# Altium PCB PCB1.PcbDoc
Units mil, origin at the board's own origin, x right, y up, seen from the top; angles counter-clockwise.
Board outline 1875 x 1255 mil, 2 copper layers (Top Layer, Bottom Layer); 10 components, 6 nets, 21 pads, 0 vias.
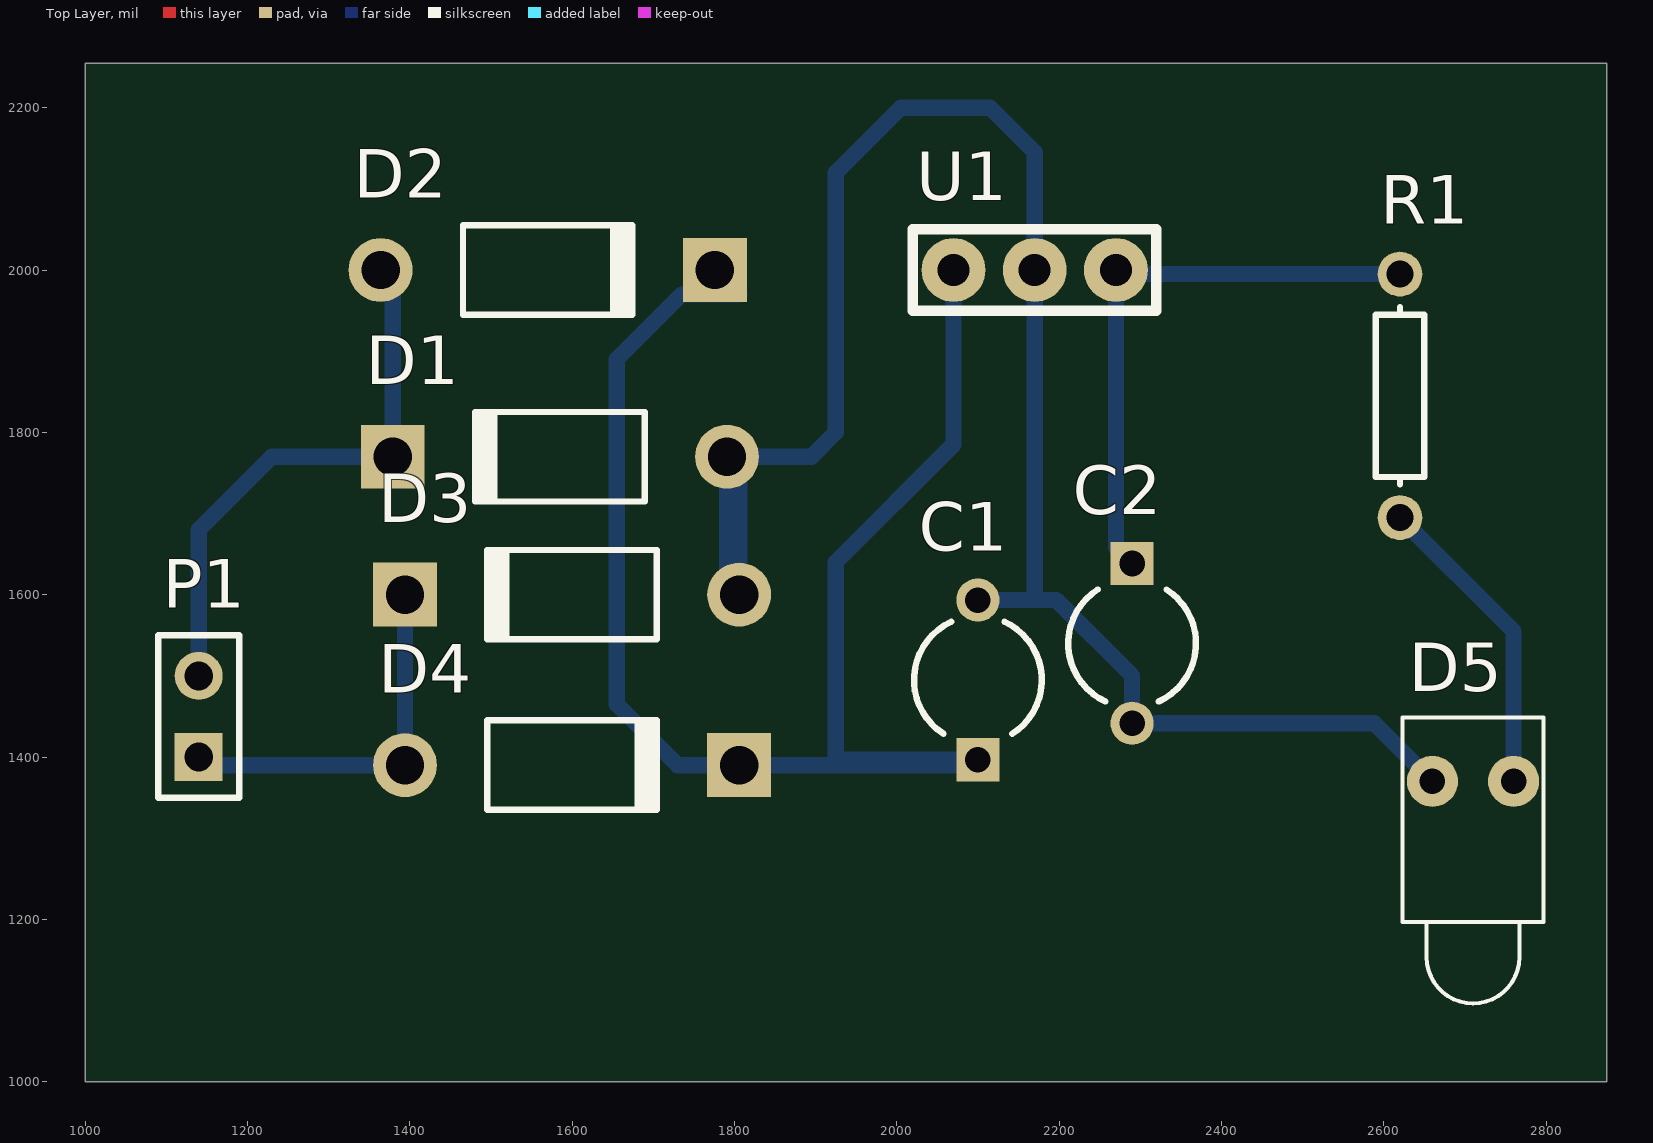
[diagram p0: Top Layer view]
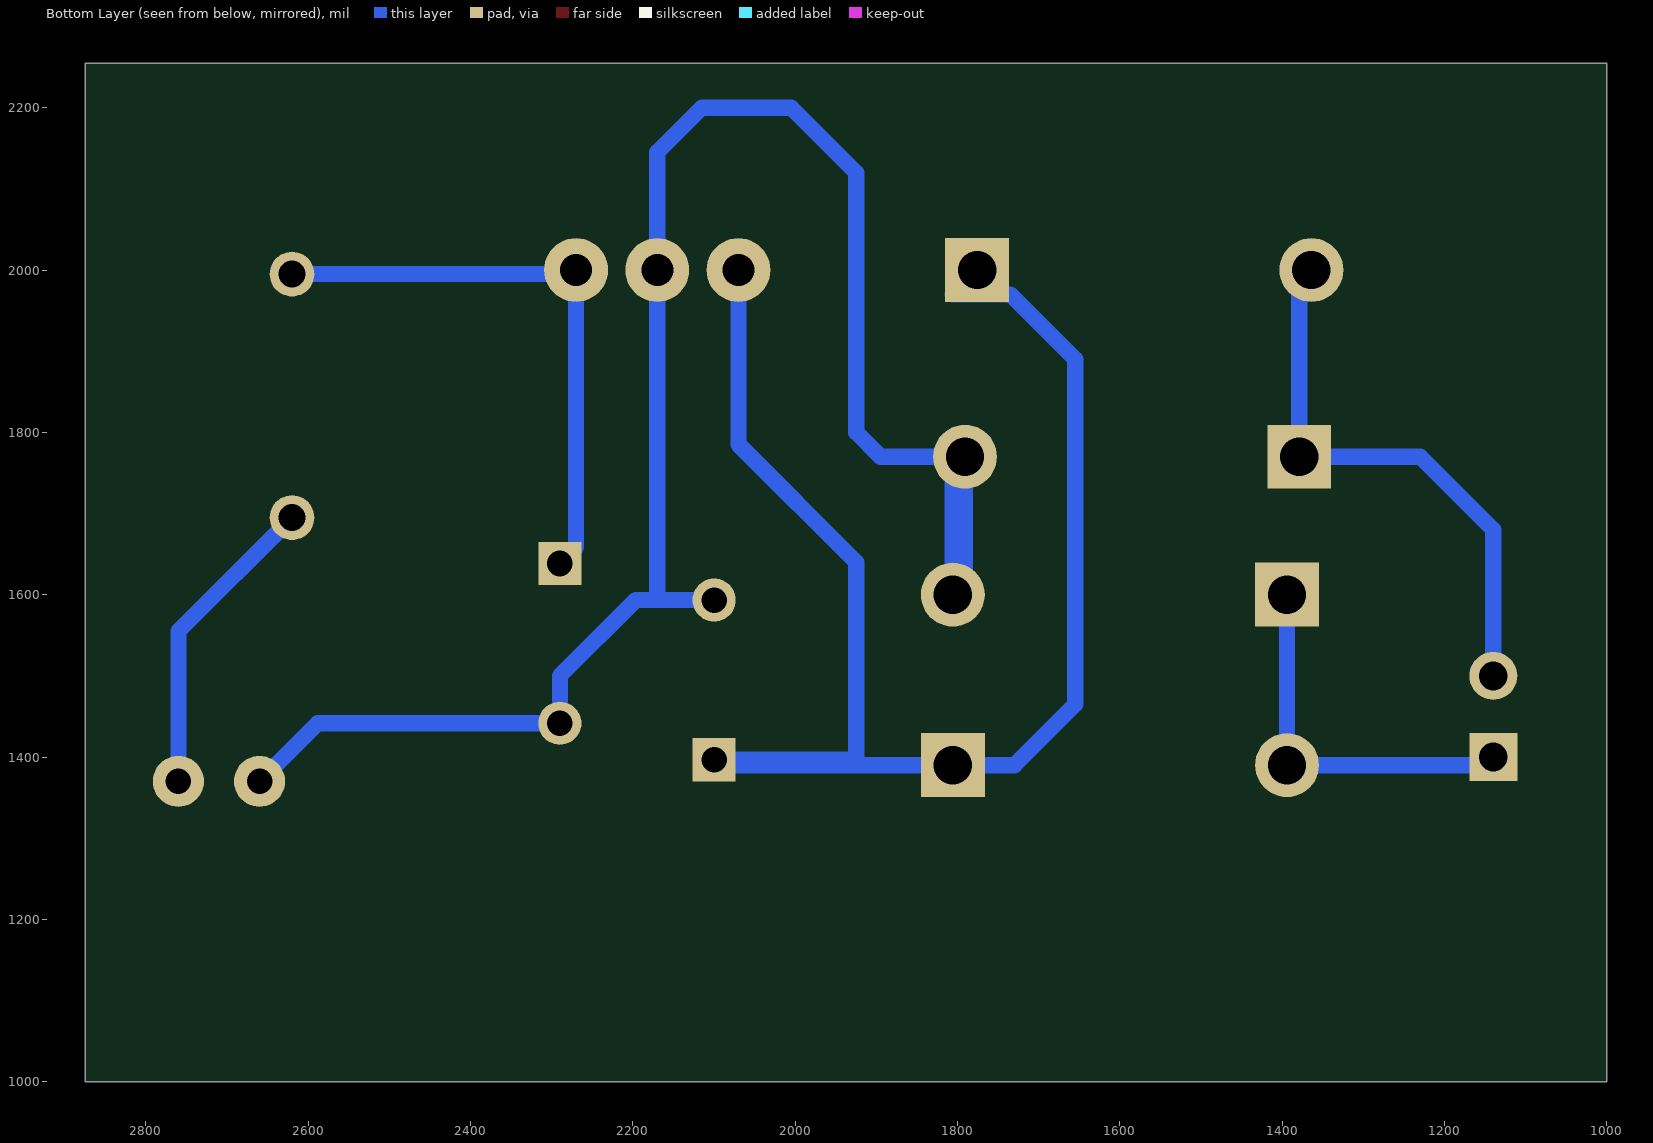
[diagram p1: Bottom Layer view, seen from below]

## Layer stack, top to bottom
Top Solder: solder mask 0.4, Solder Resist, Dk 3.5
Top Layer: signal copper 1.4
Dielectric 1: dielectric 12.6, FR-4, Dk 4.8
Bottom Layer: signal copper 1.4
Bottom Solder: solder mask 0.4, Solder Resist, Dk 3.5

## Board outline
1000,1000 2875,1000 2875,2255 1000,2255

## Design rules (kind name [scope] priority, off if disabled: settings)
Clearance [All] p1: gap=10
PolygonConnect [All] p1: connectstyle=Relief reliefconductorwidth=10 reliefentries=4 polygonreliefangle="90 Angle" airgapwidth=10
RoutingVias [All] p1: holewidth=28 width=50 viastyle="Through Hole" minholewidth=28 minwidth=50 maxholewidth=28 maxwidth=50
SolderMaskExpansion [All] p1: expansion=4
Width [All] p1: maxlimit=80 minlimit=20 preferedwidth=40
30 further rules are at their usual default settings.

## Classes and differential pairs
component class Sheet1: C1 D1 D2 D3 D4 P1 R1 U1 U?

## Components (designator, comment, footprint, x,y, rotation, side; value= is the part's Value field where it differs from the comment)
C1 "Cap2" CAPR5-4X5 2100,1495 r90 top
C2 "Cap2" CAPR5-4X5 2290,1540 r270 top
D1 "Diode 1N4007" DO-41 1585,1770 r180 top
D2 "Diode 1N4007" DO-41 1570,2000 r0 top
D3 "Diode 1N4007" DO-41 1600,1600 r180 top
D4 "Diode 1N4007" DO-41 1600,1390 r0 top
D5 "LED1" LED-1 2710,1370 r270 top
P1 "Header 2" HDR1X2 1140,1400 r90 top
R1 "Res1" AXIAL-0.3 2620,1845 r90 top
U1 "LM7805" LM7805 2070,2000 r0 top

## Footprints (in the part's own frame and the unit in brackets; to place one, negate y for a bottom-side part, rotate by r counter-clockwise, add the part's x,y. Pads: shape width x height; smd on the part's side, far side on the other; paste and mask are expansions set on the pad)
AXIAL-0.3 [mm] "Axial Device, Thru-Hole; 2 Leads; 0.3 in Pin Spacing"
  round 1.4 hole 0.85: 1(-3.81,0) 2(3.81,0)
  silkscreen extent -2.77,-0.76 2.77,0.76
CAPR5-4X5 [mm] "Capacitor; 2 Leads"
  rect 1.35x1.35 hole 0.8: 1(-2.5,0)
  round 1.35 hole 0.8: 2(2.5,0)
  silkscreen extent -1.69,-2 1.82,2
DO-41 [mm] "Diode, Axial; Body 5.2 x 2.7 mm (LxDia. max), Lead Dia. 0.86 mm (max)"
  round 2 hole 1.2: 1(-5.23,0)
  rect 2x2 hole 1.2: 2(5.23,0)
  silkscreen extent -2.65,-1.4 2.75,1.4
HDR1X2 [mm] "Connector; Header; 2 Position"
  rect 1.5x1.5 hole 0.9: 1(0,0)
  round 1.5 hole 0.9: 2(2.54,0)
  silkscreen extent -1.27,-1.27 3.81,1.27
LED-1 [mm] "LED; 2 Leads"
  round 1.6 hole 0.8: 1(0,1.27) 2(0,-1.27)
  silkscreen extent -2,-2.2 6.95,2.2
LM7805 [mm]
  round 2 hole 1: 1(0,0) 2(2.54,0) 3(5.08,0)
  silkscreen extent -1.27,-1.27 6.35,1.27

## Part data
C1 C2: "Capacitor"
D1 D2 D3 D4: "1 Amp General Purpose Rectifier"
D5: "Typical RED GaAs LED"
P1: "Header, 2-Pin"
R1: "Resistor"
U1: library part Component_1

## Nets (pads, with @x,y where several pads share a name; then routed paths per layer and width w, separated by ;. In a path a pad name is that pad's centre, name@x,y a point inside that pad or via, vN(x,y) a via of type N, cw(c..) or ccw(c..) an arc to the next point about the centre after c; other vN are vias at no path point)
GND: C1.2 C2.2 D1.1 D3.1 D5.2 U1.2 | length 2330.8
  Bottom Layer w20: D3.1@1790.91,1600 D1.1 ; D3.1 1805.91,1770 1895,1770 1925,1800 1925,2120 2005,2200 2115,2200 2170,2145 U1.2 2170,1593.43 ; C1.2 2196.57,1593.43 2290,1500 C2.2 2588.43,1441.57 D5.2
NetC1_1: C1.1 D2.2 D4.2 U1.1 | length 2013.2
  Bottom Layer w20: U1.1 2070,1785 1925,1640 1925,1395 1926.57,1396.57 C1.1 2093.43,1390 D4.2 1730,1390 1655,1465 1655,1890 1735,1970 1805.91,1970 1777.95,1997.95 D2.2 ; D2.2 1785.91,2010 1790,2010 1775.91,1995.91 D2.2
NetD1_2: D1.2 D2.1 P1.2 | length 692.6
  Bottom Layer w20: P1.2 1140,1680 1230,1770 D1.2 1379.09,1985 D2.1
NetD3_2: D3.2 D4.1 P1.1 | length 468.2
  Bottom Layer w20: P1.1 1150,1390 D4.1 D3.2
NetD5_1: D5.1 R1.1 | length 383
  Bottom Layer w20: R1.1 2760,1555 D5.1
VCC: C2.1 R1.2 U1.3 | length 693.6
  Bottom Layer w20: C2.1@2270,1658.43 U1.3 2275,1995 R1.2

## Silkscreen, mask and mechanical layers (free items; w line width, h text height)
Mechanical 1:
  the board outline again, w12.99